# EAGLE board circuitdraft (EAGLE 9.5.1)
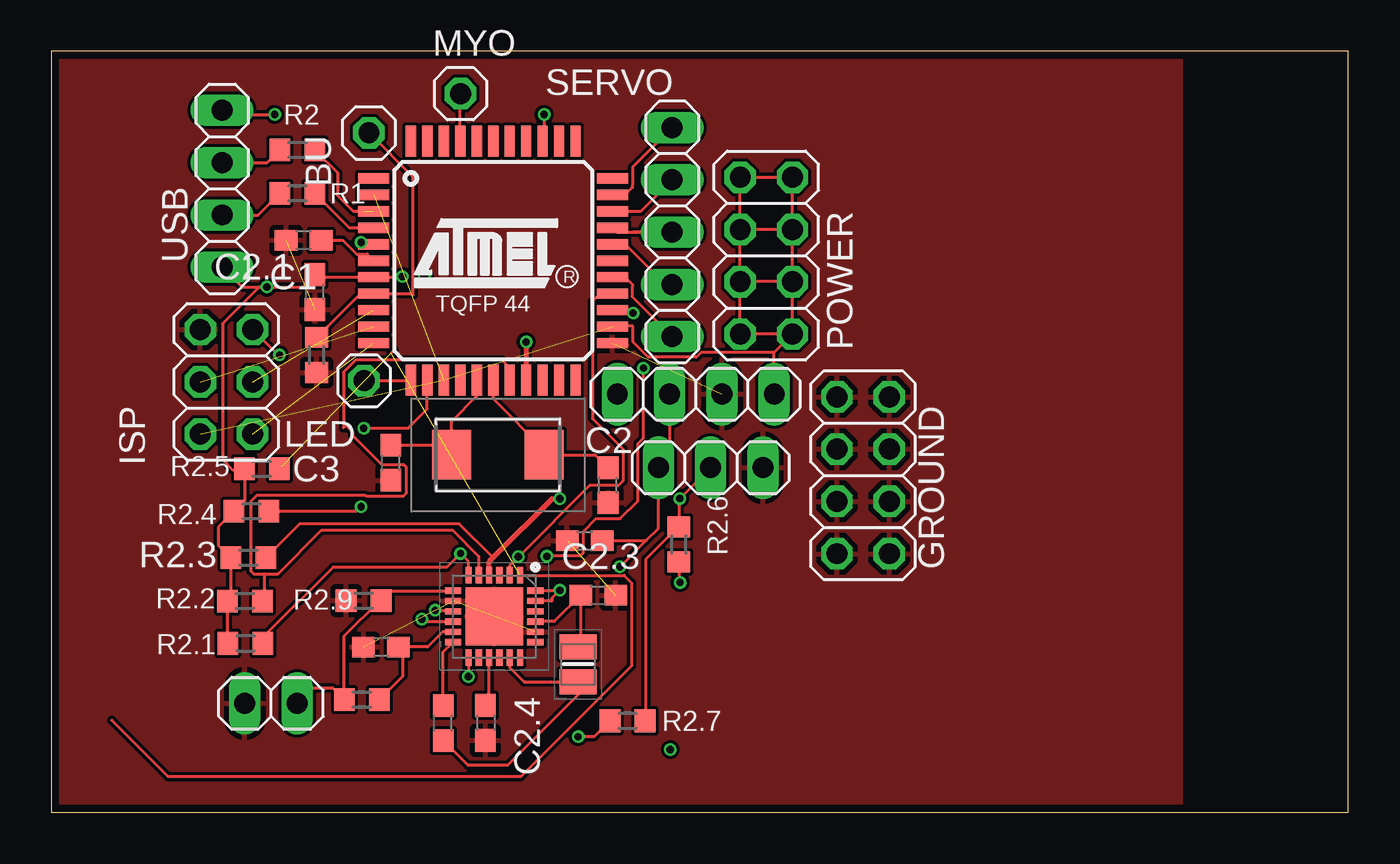
[diagram p0: board, top side]
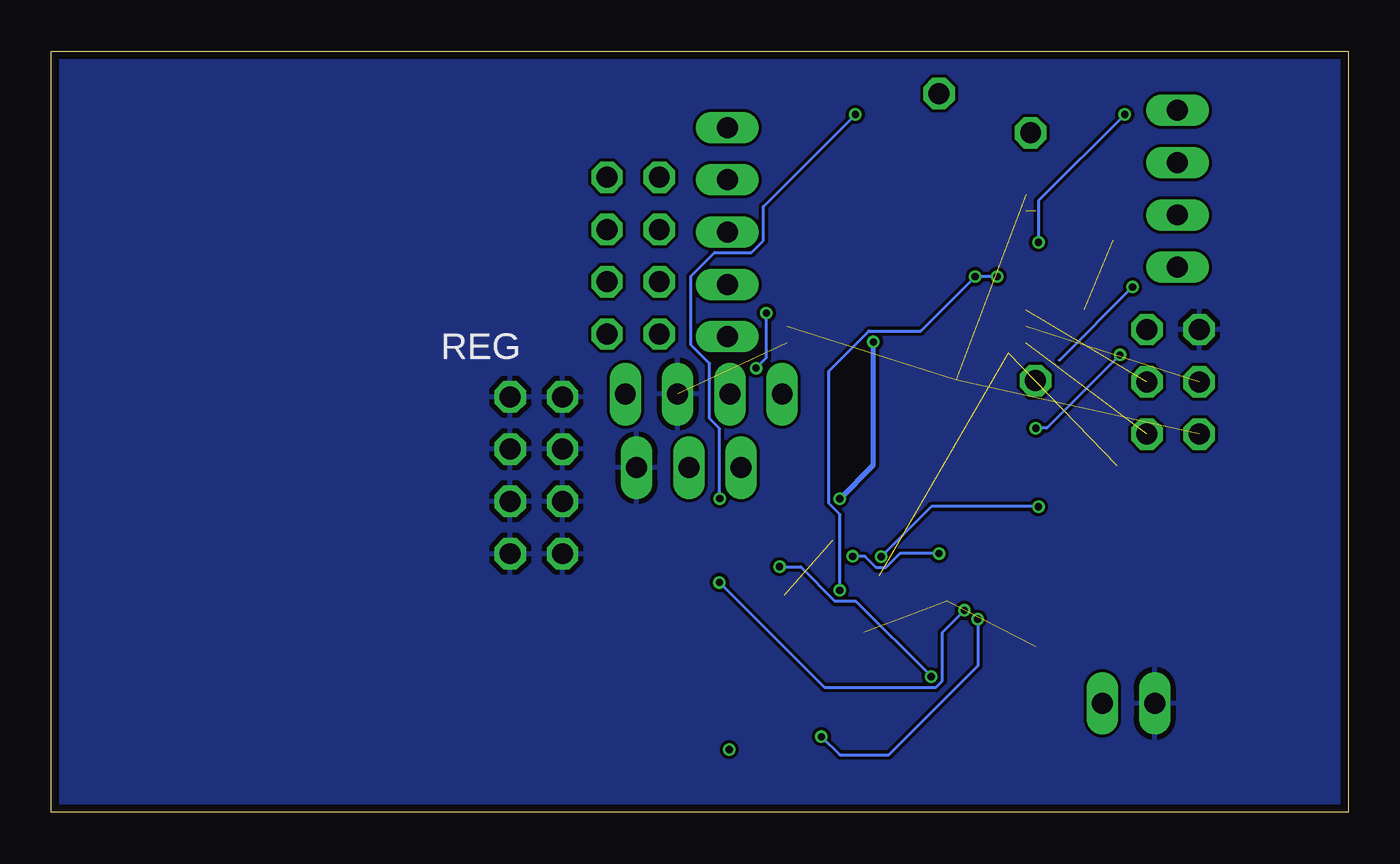
[diagram p1: board, bottom side, seen from below]

Size 62.97 x 36.97 mm. Coordinates in mm from the lower left corner, seen from the top.
Outline: 0,0 62.97,0 62.97,36.97 0,36.97 0,0
Copper layers (1*16): Top 0.035559375mm / dielectric 1.6mm / Bottom 0.035559375mm
Design rules "oshpark-2layer *": minimum track width 6mil, minimum drill 10mil, track to track 6mil, track to pad 6mil, pad to pad 6mil, via to via 6mil, smd to smd 6mil, copper to edge 15mil, drill to drill 6mil, minimum pad ring 5mil, minimum via ring 5mil, stop-mask expansion 2.5mil, vias tented up to drill 30mil, thermal gap 10mil

## Footprints (pad centres in the part's own frame; a part is rotated, then mirrored left to right if it is on the bottom)
1X03 = drill 1.016 long: 1 -2.54,0; 2 0,0; 3 2.54,0
1X01 = drill 1.016 octagon: 1 0,0
C0603 = smd 1.1 x 1: 1 -0.85,0; 2 0.85,0
2X04 = drill 1.016 octagon: 1 -3.81,-1.27; 2 -3.81,1.27; 3 -1.27,-1.27; 4 -1.27,1.27; 5 1.27,-1.27; 6 1.27,1.27; 7 3.81,-1.27; 8 3.81,1.27
QFN50P400X400X100-25N = smd 0.8 x 0.3: 1 -2,1.25; 2 -2,0.75; 3 -2,0.25; 4 -2,-0.25; 5 -2,-0.75; 6 -2,-1.25; 13 2,-1.25; 14 2,-0.75; 15 2,-0.25; 16 2,0.25; 17 2,0.75; 18 2,1.25 | smd 0.3 x 0.8: 7 -1.25,-2; 8 -0.75,-2; 9 -0.25,-2; 10 0.25,-2; 11 0.75,-2; 12 1.25,-2; 19 1.25,2; 20 0.75,2; 21 0.25,2; 22 -0.25,2; 23 -0.75,2; 24 -1.25,2 | smd 2.8 x 2.8: 25 0,0
2X03 = drill 1.016 octagon: 1 -2.54,-1.27; 2 -2.54,1.27; 3 0,-1.27; 4 0,1.27; 5 2.54,-1.27; 6 2.54,1.27
INDC2016X100N = smd 1.2 x 1.8: 1 -0.85,0; 2 0.85,0
ECS2501823GJGNTR = smd 1.9 x 2.4: 1 -2.25,0; 2 2.25,0
R0603 = smd 1 x 1.1: 1 -0.85,0; 2 0.85,0
1X04 = drill 1.016 long: 1 -3.81,0; 2 -1.27,0; 3 1.27,0; 4 3.81,0
1X05 = drill 1.016 long: 1 -5.08,0; 2 -2.54,0; 3 0,0; 4 2.54,0; 5 5.08,0
1X02 = drill 1.016 long: 1 -1.27,0; 2 1.27,0
TQFP44 = smd 1.5 x 0.5: 1 -5.8,4; 2 -5.8,3.2; 3 -5.8,2.4; 4 -5.8,1.6; 5 -5.8,0.8; 6 -5.8,0; 7 -5.8,-0.8; 8 -5.8,-1.6; 9 -5.8,-2.4; 10 -5.8,-3.2; 11 -5.8,-4; 23 5.8,-4; 24 5.8,-3.2; 25 5.8,-2.4; 26 5.8,-1.6; 27 5.8,-0.8; 28 5.8,0; 29 5.8,0.8; 30 5.8,1.6; 31 5.8,2.4; 32 5.8,3.2; 33 5.8,4 | smd 0.5 x 1.5: 12 -4,-5.8; 13 -3.2,-5.8; 14 -2.4,-5.8; 15 -1.6,-5.8; 16 -0.8,-5.8; 17 0,-5.8; 18 0.8,-5.8; 19 1.6,-5.8; 20 2.4,-5.8; 21 3.2,-5.8; 22 4,-5.8; 34 4,5.8; 35 3.2,5.8; 36 2.4,5.8; 37 1.6,5.8; 38 0.8,5.8; 39 0,5.8; 40 -0.8,5.8; 41 -1.6,5.8; 42 -2.4,5.8; 43 -3.2,5.8; 44 -4,5.8

## Placement (x,y rotation side)
BATIO  [1X03]  32.01,16.75 0 top
BU  [1X01]  15.42,33.02 90 top
C1  1 uF  [C0603]  12.25,27.8 180 top
C2  22pF  [C0603]  27.03,15.9 90 top
C2.1  1 uF  [C0603]  12.8,25.28 90 top
C2.2  4.7 uF  [C0603]  16,8.04 180 top
C2.3  1 uF  [C0603]  25.9,13.21 0 top
C2.4  44 uF  [C0603]  21.08,4.36 270 top
C2.5  47 nF  [C0603]  19.02,4.35 90 top
C2.6  10 uF  [C0603]  26.55,10.56 0 top
C3  22 pF  [C0603]  16.49,16.98 90 top
GROUND  [2X04]  39.42,16.38 90 top
IC1  BQ25887RGER  [QFN50P400X400X100-25N]  21.51,9.52 270 top
ISP  [2X03]  8.5,20.92 90 top
L2  1 uH  [INDC2016X100N]  25.57,7.2 270 top
LED  [1X01]  15.17,20.98 0 top
MYO  [1X01]  19.86,34.92 0 top
POWER  [2X04]  34.72,27.05 90 top
Q1  16 MHz  [ECS2501823GJGNTR]  21.68,17.37 0 top
R1  22 Ohms  [R0603]  11.94,30.08 0 top
R2  22 Ohms  [R0603]  11.94,32.18 0 top
R2.1  10000 Ohms  [R0603]  9.43,8.22 180 top
R2.2  10000 Ohms  [R0603]  9.39,10.27 180 top
R2.3  10000 Ohms  [R0603]  9.56,12.38 180 top
R2.4  10000 Ohms  [R0603]  9.72,14.63 180 top
R2.5  10000 Ohms  [R0603]  10.23,16.69 180 top
R2.6  300 Ohms  [R0603]  30.47,13.02 270 top
R2.7  12 Ohms  [R0603]  27.98,4.46 180 top
R2.8  5.23 kOhms  [R0603]  15.07,5.49 0 top
R2.9  30.1 kOhms  [R0603]  15.16,10.29 0 top
RBUTTON  220 Ohm  [R0603]  12.88,22.23 270 top
REG  [1X04]  31.29,20.32 180 top
SERVO  [1X05]  30.15,28.19 270 top
TS  [1X02]  10.66,5.3 180 top
U$1  ATMEGA32U4-AU  [TQFP44]  21.45,26.8 0 top
USB  [1X04]  8.29,30.3 90 top

## Library data of the parts
BATIO BU GROUND ISP LED MYO POWER REG SERVO TS USB = pinhead
C1 C2 C2.1-C2.6 C3 = rcl; SPICEPREFIX: C
IC1 = SamacSys_Parts; DESCRIPTION: I2C Controlled, 2-cell, 2-A boost-mode battery charger with cell balancing; HEIGHT: 1mm; MANUFACTURER_NAME: Texas Instruments; MANUFACTURER_PART_NUMBER: BQ25887RGER; MOUSER_PART_NUMBER: 595-BQ25887RGER; MOUSER_PRICE-STOCK: https://www.mouser.com/Search/Refine.aspx?Keyword=595-BQ25887RGER
L2 = SamacSys_Parts; DESCRIPTION: Fixed Inductors 1.0uH 50mOhms 3.6A 20%; HEIGHT: 1mm; MANUFACTURER_NAME: TDK; MANUFACTURER_PART_NUMBER: TFM201610GHM-1R0MTAA; MOUSER_PART_NUMBER: 810-TFM201610GHM1R0A; MOUSER_PRICE-STOCK: https://www.mouser.com/Search/Refine.aspx?Keyword=810-TFM201610GHM1R0A
Q1 = SamacSys_Parts; DESCRIPTION: Crystals 16MHz 18pF -40C +85C; HEIGHT: 1mm; MANUFACTURER_NAME: ECS; MANUFACTURER_PART_NUMBER: ECS-160-18-23G-JGN-TR; MOUSER_PART_NUMBER: 520-16.0-18-23G-JGNT; MOUSER_PRICE-STOCK: https://www.mouser.com/Search/Refine.aspx?Keyword=520-16.0-18-23G-JGNT
R1 R2 R2.1-R2.9 RBUTTON = rcl; SPICEPREFIX: R
U$1 = mega32U4

## Nets
B+: BATIO.1 C2.3.2 IC1.13 REG.3
BTST: C2.5.2 IC1.12
D+: R1.1 USB.2
D-: R2.1 USB.3
DATAIN: LED.1 U$1.12
ENABLE: REG.4
GND: BATIO.3 C1.2 C2.1 C2.1.1 C2.2.2 C2.3.1 C2.4.2 C2.6.2 C3.1 GROUND.1 GROUND.2 GROUND.3 GROUND.4 GROUND.5 GROUND.6 GROUND.7 GROUND.8 IC1.8 IC1.20 IC1.25 ISP.6 R2.9.1 RBUTTON.2 REG.2 TS.2 U$1.23
INT: IC1.6 R2.1.1 U$1.25
INTERRUPT: BU.1 RBUTTON.1 U$1.8
MIDDLE: BATIO.2 R2.6.1 R2.7.1 U$1.36
MISO: ISP.1 U$1.11
MOSI: ISP.4 U$1.10
MYOSIGNAL: MYO.1 U$1.41
N$2: R2.2 U$1.3
N$3: IC1.10 R2.7.2
N$4: R1.2 U$1.4
N$5: C3.2 Q1.1 U$1.16
N$6: C2.2 Q1.2 U$1.17
N$7: IC1.1 R2.5.1
N$8: C1.1 U$1.6
N$10: IC1.9 R2.6.2
N$18: C2.5.1 IC1.17 L2.2
N$19: C2.2.1 IC1.11 R2.8.2
N$20: C2.4.1 IC1.15
N$21: C2.6.1 IC1.21 L2.1
POWER: ISP.2 POWER.1 POWER.2 POWER.3 POWER.4 POWER.5 POWER.6 POWER.7 POWER.8 REG.1 U$1.2 U$1.14 U$1.24
RST: ISP.5 U$1.13
SCK: ISP.3 U$1.9
SCL: IC1.5 R2.2.1 U$1.18
SDA: IC1.4 R2.3.1 U$1.19
SIGNAL1: SERVO.4 U$1.29
SIGNAL2: SERVO.3 U$1.30
SIGNAL3: SERVO.1 U$1.32
SIGNAL4: SERVO.2 U$1.31
SIGNAL5: SERVO.5 U$1.27
STAT: IC1.2 R2.4.1 U$1.26
TS: IC1.7 R2.8.1 R2.9.2 TS.1
UGND: U$1.5 USB.4
VBUS: C2.1.2 IC1.23 IC1.24 R2.1.2 R2.2.2 R2.3.2 R2.4.2 R2.5.2 U$1.7 USB.1

## Tracks (layer width: path | path; a pad name or v marks a point on that pad's centre or on a via)
B+  (via drill 0.35)
  Top 0.152: IC1.13 20.25,6.62 v20.24,6.6 | v27.61,11.94 28.88,13.21 | 28.88,13.21 29.47,13.8 BATIO.1 30.02,17.3 REG.3 | C2.3.2 28.88,13.21
  Bottom 0.152: v20.24,6.6 23.9,10.26 24.91,10.26 26.58,11.94 v27.61,11.94
BTST
  Top 0.152: C2.5.2 19.02,7.79 IC1.12
D+
  Top 0.152: USB.2 10.04,29.03 R1.1
D-
  Top 0.152: USB.3 10.48,31.57 R2.1
DATAIN
  Top 0.152: LED.1 17.42,20.98 U$1.12
GND  (6 unrouted)
  pour Top: 0,0 0,36.97 54.87,36.97 54.87,0
  pour Bottom: 0,0 0,36.97 62.97,36.97 62.97,0
INT  (via drill 0.35)
  Top 0.152: R2.1.1 10.28,8.52 13.67,11.91 19.2,11.91 v19.87,12.58 20.25,12.19 IC1.6 | v28.75,21.59 28.75,18.19 28.48,17.92 28.48,15.13 27.62,14.27 26.44,14.27 25.83,13.66 25.83,12.61 25.7,12.48 24.09,12.48 v24.05,12.45 | v28.25,24.26 28.11,24.41 U$1.25
  Bottom 0.152: v19.87,12.58 21.77,12.58 22.46,11.89 22.9,11.89 23.45,12.45 v24.05,12.45 | v28.75,21.59 28.25,22.09 v28.25,24.26
INTERRUPT
  Top 0.152: RBUTTON.1 15.01,25.2 15.42,25.2 | 15.42,25.2 U$1.8 17.52,25.2 17.57,25.15 17.57,30.86 BU.1 | 15.36,25.15 15.42,25.2
MIDDLE  (via drill 0.35)
  Top 0.152: BATIO.2 v30.52,15.25 30.47,15.21 R2.6.1 30.42,13.87 28.86,12.32 28.86,4.49 R2.7.1 | v23.92,33.91 23.92,32.68 U$1.36
  Bottom 0.152: v30.52,15.25 30.52,18.65 31.01,19.15 31.01,21.82 31.9,22.7 31.9,26.06 30.76,27.2 28.98,27.2 28.4,27.78 28.4,29.44 v23.92,33.91
MISO  (1 unrouted)
MOSI  (1 unrouted)
MYOSIGNAL
  Top 0.152: U$1.41 MYO.1
N$2  (1 unrouted)
  Top 0.152: R2.2 13.89,31.08 13.89,29.97 14.65,29.21 15.16,29.21
N$3  (via drill 0.35)
  Top 0.152: R2.7.2 26.35,3.68 v25.58,3.68 | 18.11,9.27 v17.98,9.4 18.11,9.27 | 18.11,9.27 IC1.10
  Bottom 0.152: v25.58,3.68 24.69,2.79 22.3,2.79 17.98,7.11 v17.98,9.4
N$4
  Top 0.152: R1.2 14.46,28.41 U$1.4
N$5
  Top 0.152: C3.2 18.97,17.83 Q1.1 19.43,19 20.65,20.22 U$1.16
N$6
  Top 0.152: Q1.2 23.93,17.9 | Q1.2 26.41,17.37 C2.2 | U$1.17 21.45,20.1 23.93,17.62 Q1.2
N$7  (2 unrouted)
  Top 0.152: IC1.1 27.81,11.52 28.18,11.15 28.18,7.13 22.79,1.74 5.68,1.74 2.93,4.49 | 16.63,22.46 16.5,22.33 | R2.5.1 11.21,16.83
N$8
  Top 0.152: U$1.6 15.33,27.13 14.81,27.13 14.13,27.8 C1.1
N$10  (via drill 0.35)
  Top 0.152: R2.6.2 30.47,11.23 v30.53,11.18 | v18.63,9.82 19.46,9.82 IC1.9
  Bottom 0.152: v18.63,9.82 19.71,8.74 19.71,6.38 20.02,6.07 25.43,6.07 v30.53,11.18
N$16  (via drill 0.35)
  other vias: 30.05,3.05
N$18
  Top 0.152: C2.5.1 20.23,2.29 22.15,2.29 25.57,5.71 L2.2 22.95,6.35 22.26,7.05 IC1.17
N$19
  Top 0.152: IC1.11 19,8.77 18.26,8.04 17.07,8.04 | 17.07,8.04 C2.2.1 | R2.8.2 17.07,6.63 17.07,8.04
N$20
  Top 0.152: C2.4.1 21.26,5.38 IC1.15
N$21
  Top 0.152: IC1.21 24.42,9.27 C2.6.1 25.7,8.18 L2.1
POWER  (3 unrouted)
  Top 0.152: REG.1 35.1,22.35 | 35.1,22.35 POWER.1 | POWER.1 POWER.3 | POWER.4 POWER.2 POWER.1 | POWER.4 POWER.6 | POWER.3 POWER.5 | POWER.5 POWER.7 POWER.8 POWER.6 | POWER.3 POWER.4 | POWER.5 POWER.6 | 35.1,22.35 31.55,22.35 31.32,22.12 28.98,22.12 28.24,22.86 28.24,23.62 27.27,23.62 U$1.24
RST  (via drill 0.35)
  Top 0.152: v11.07,22.23 11,22.23 ISP.5 | v15.16,18.67 17.32,18.67 18.25,19.6 U$1.13
  Bottom 0.152: v11.07,22.23 14.63,18.67 v15.16,18.67
SCK  (1 unrouted)
SCL
  Top 0.152: U$1.18 22.25,21.61 21.88,21.98 15.29,21.98 14.78,21.98 14.18,21.39 14.18,18.92 | 14.18,18.92 14.18,18.68 | 14.18,18.92 14.63,18.48 14.63,18.32 16.04,16.91 17.09,16.91 17.22,16.78 17.22,15.49 17.09,15.36 15.29,15.36 15.24,15.41 9.97,15.41 9.68,15.12 9.68,11.73 9.82,11.6 10.34,11.6 | 10.34,11.6 11.01,11.6 13.12,13.72 19.48,13.72 20.75,12.44 IC1.5 | 10.34,11.6 10.34,10.37 R2.2.1
SDA  (via drill 0.35)
  Top 0.152: 21.45,12.38 19.8,14.03 12.06,14.03 R2.3.1
  Top 0.254: IC1.4 21.26,12.19 21.45,12.38 24.31,15.24 v24.69,15.24 | v23.05,22.86 U$1.19
  Bottom 0.254: v24.69,15.24 23.05,16.87 v23.05,22.86
SIGNAL1
  Top 0.152: 29.89,25.65 SERVO.4 29.39,25.65 29.39,26.08 27.86,27.61 U$1.29
SIGNAL2
  Top 0.152: 28.24,28.19 SERVO.3 29.39,28.19 27.46,28.19 U$1.30
SIGNAL3
  Top 0.152: SERVO.1 28.23,31.36 28.23,30.46 28.23,30.38 27.86,30 U$1.32
SIGNAL4
  Top 0.152: SERVO.2 28.62,29.21 28.62,29.2 U$1.31
SIGNAL5
  Top 0.152: SERVO.5 28.23,25.03 28.23,25.55 28.23,25.63 27.86,26 U$1.27
STAT  (via drill 0.35)
  Top 0.152: U$1.26 26.65,25.2 26.27,24.83 26.27,19.14 27.76,17.65 27.76,16.11 27.54,15.89 26.14,15.89 v22.68,12.42 22.26,12 IC1.2 | v15.04,14.86 14.81,14.63 R2.4.1
  Bottom 0.152: v15.04,14.86 20.24,14.86 v22.68,12.42
TS
  Top 0.152: IC1.7 16.49,10.77 R2.9.2 15.95,10.29 14.23,8.57 R2.8.1 13.65,6.06 11.93,6.06 TS.1
UGND  (via drill 0.35)
  Top 0.152: USB.4 8.49,33.91 v10.84,33.91 | 15.56,27.7 U$1.5 15.13,27.61 v15.04,27.7
  Bottom 0.152: v10.84,33.91 15.04,29.72 v15.04,27.7
VBUS  (via drill 0.35)
  Top 0.152: USB.1 9.25,25.53 v10.46,25.53 | v10.46,25.53 12.19,25.53 C2.1.2 12.93,26 U$1.7 17.01,26 v17.04,26.04 | v10.46,25.53 10.08,25.53 8.3,23.75 8.3,17.14 8.81,16.64 9.32,16.64 R2.5.2 9.38,15.14 R2.4.2 8.11,13.87 8.11,12.98 R2.3.2 8.71,10.44 R2.2.2 8.54,8.26 R2.1.2 | IC1.24 24.67,10.77 v24.69,10.79 24.31,10.41 24.31,10.29 24.29,10.27 IC1.23
  Bottom 0.152: v10.46,25.53 14.02,21.97 | v24.69,10.79 24.66,10.79 24.66,14.47 25.22,15.02 25.22,21.45 23.27,23.39 20.75,23.39 v18.11,26.04 v17.04,26.04